# Altium PCB TC-temp-logger-base.PcbDoc (part 5 of 5)
Units mil, origin at the board's own origin, x right, y up, seen from the top; angles counter-clockwise.
Board outline 6370.08 x 6889.76 mil, 4 copper layers (Top Layer, Layer 2, Layer 1, Bottom Layer), stack 61.581 mil thick; 216 components, 163 nets, 792 pads, 3713 vias.
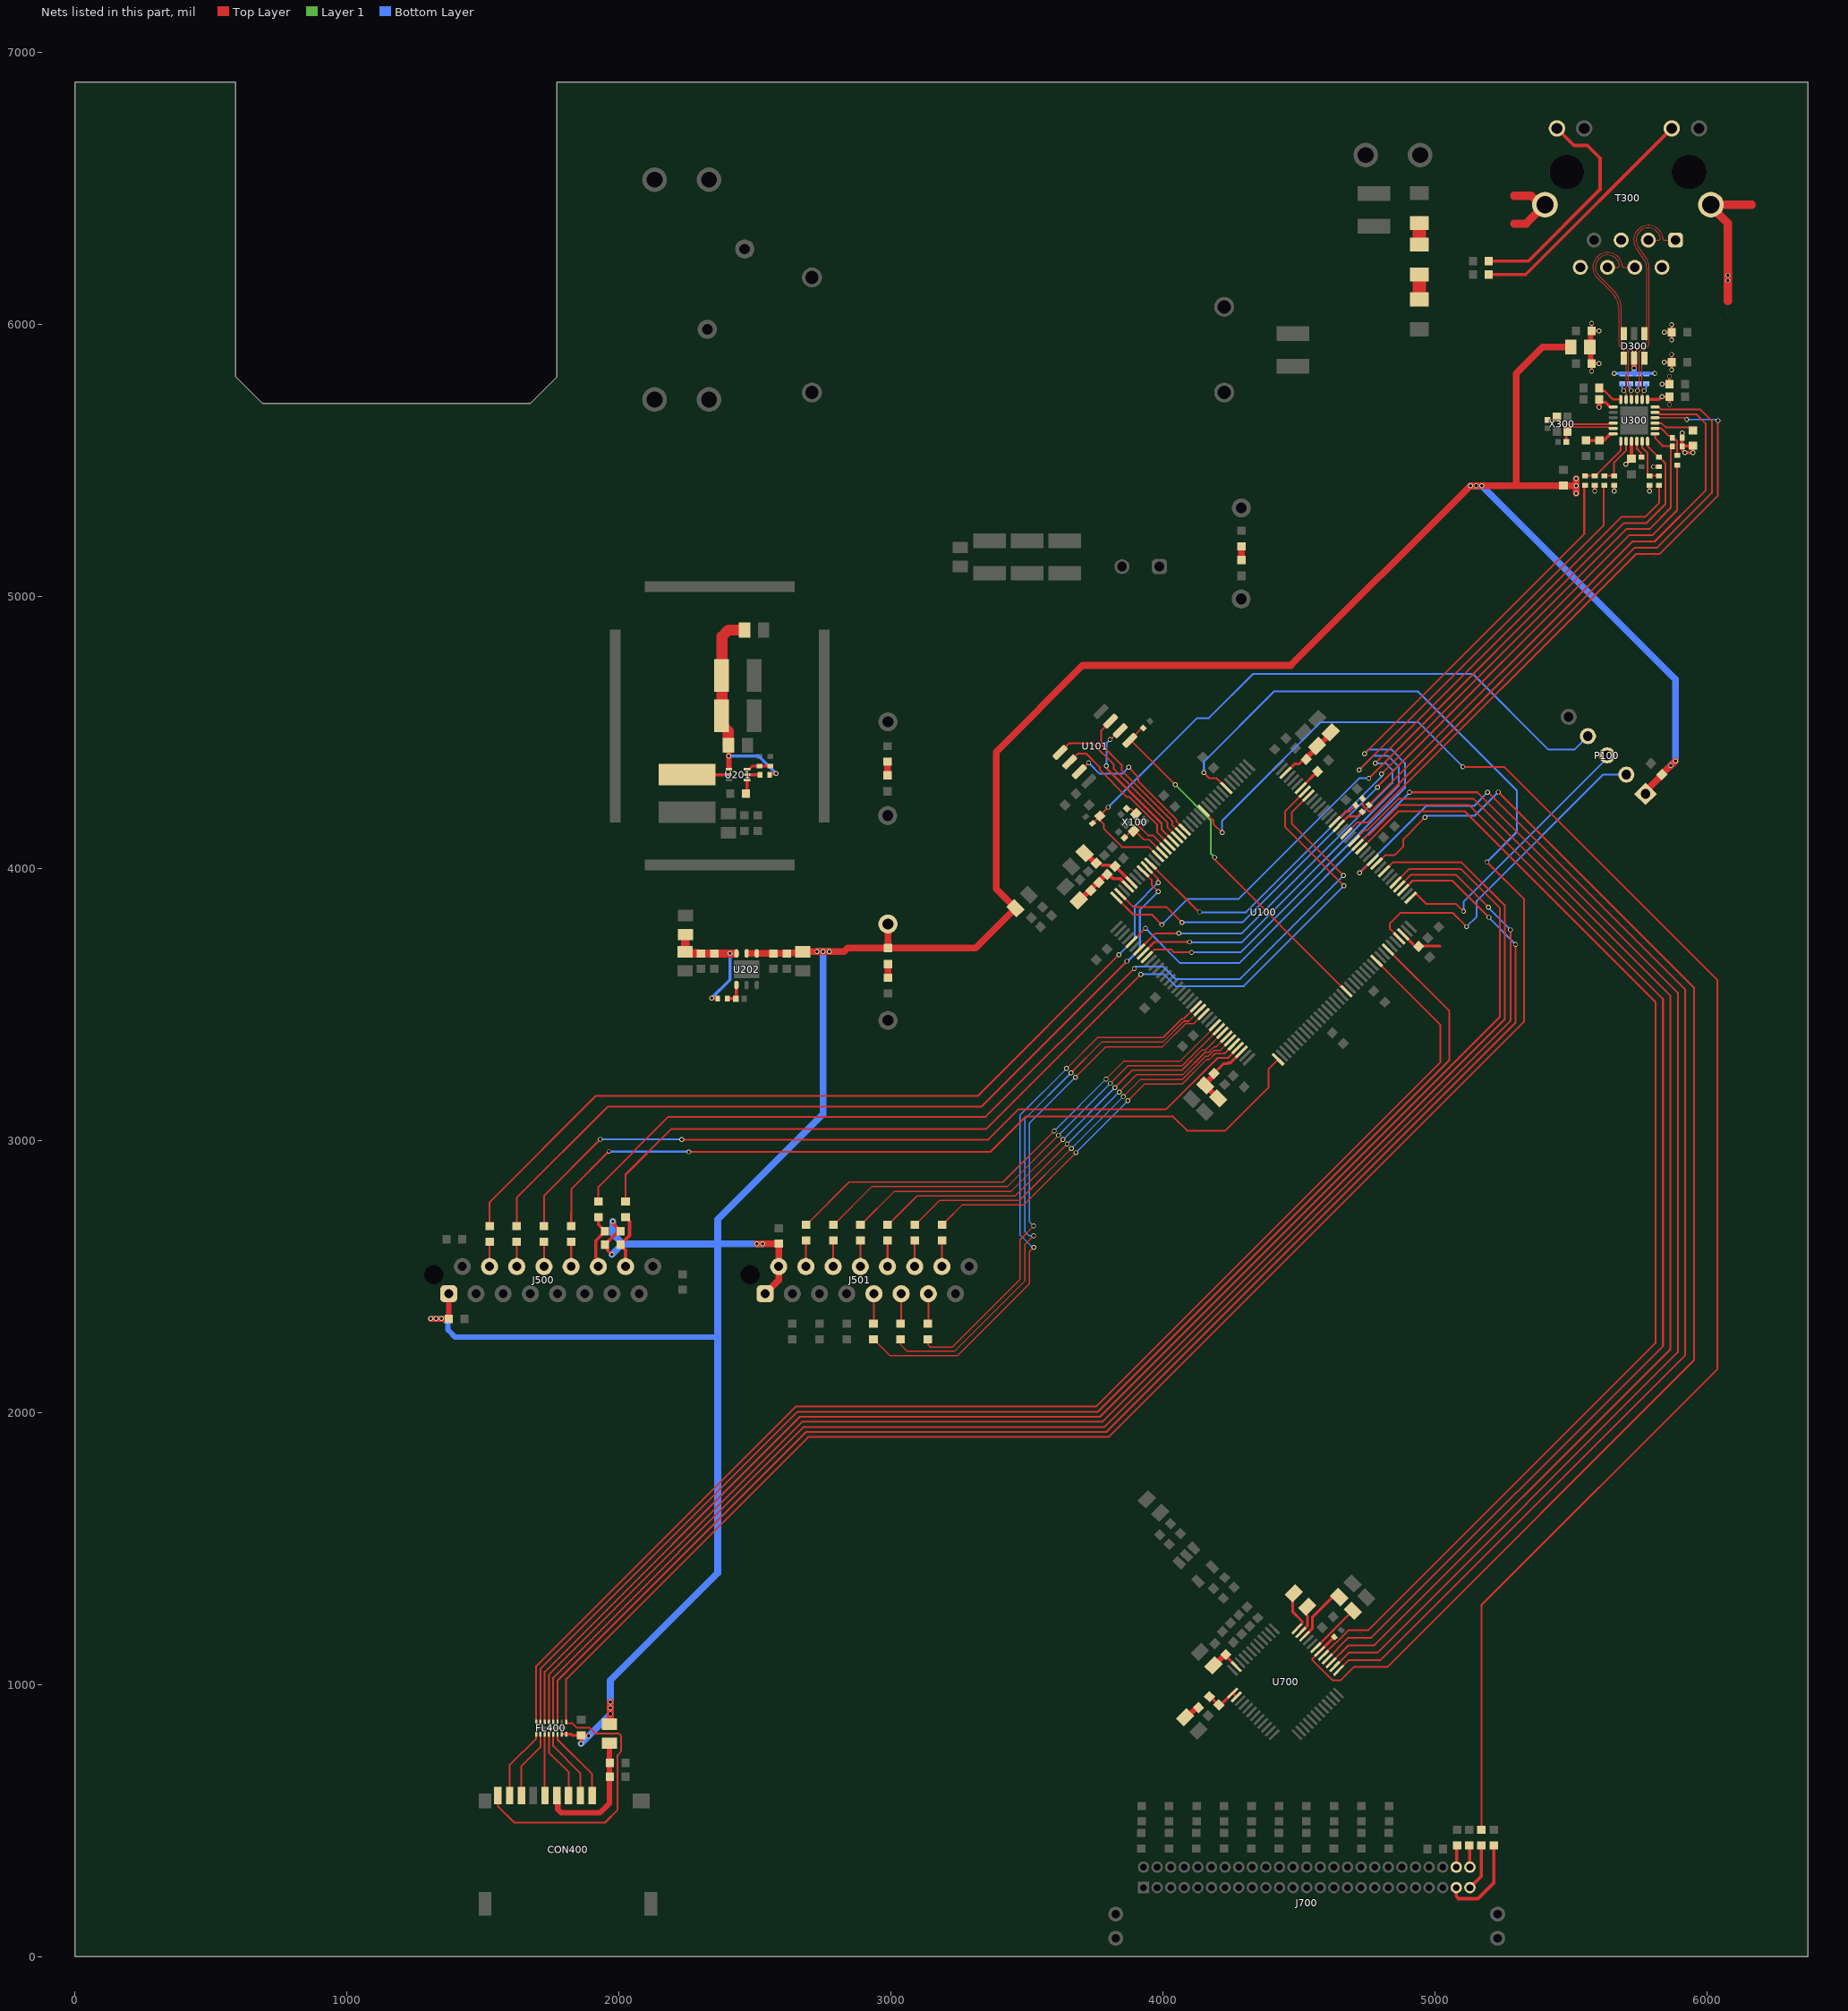
[diagram p6: the nets of this part, all layers, seen from the top]

## Via types
v1: diameter 17.72, hole 11.81, Top Layer to Bottom Layer, tented both sides, 3702 vias
v2: diameter 23.62, hole 11.81, Top Layer to Bottom Layer, 9 vias
v3: diameter 19.68, hole 7.87, Top Layer to Bottom Layer, tented both sides, 2 vias

## Nets (pads, with @x,y where several pads share a name; then routed paths per layer and width w, separated by ;. In a path a pad name is that pad's centre, name@x,y a point inside that pad or via, vN(x,y) a via of type N, cw(c..) or ccw(c..) an arc to the next point about the centre after c; other vN are vias at no path point) (continued)
HW_ID3: R705.2 U100.13 | length 6000.6
  Top Layer w6.66: U100.13@4148.61,4211.91 4184.36,4176.15 4184.36,4163.08 v1(4216.54,4130.91) ; v1(5101.38,4373.2) 5253.39,4373.2 6037.57,3589.02 6037.57,2159.02 5170,1291.44 R705.2@5170,465
  Bottom Layer w6.66: v1(4216.54,4130.91) 4216.54,4175.2 4578.65,4537.32 4937.26,4537.32 v1(5101.38,4373.2)
I2C1_SCL: R506.1 U100.136 | length 3703.7
  Top Layer w6.66: R506.1@1923.6,2774.59 1923.6,2829.11 2181.1,3086.61 3347.44,3086.61 3892.72,3631.89 v1(3893.7,3631.89) ; U100.136@4533.9,4267.58 4473.43,4207.11 4473.43,4163.39 v1(4663.39,3973.43)
  Bottom Layer w6.66: v1(3893.7,3631.89) 3900.59,3638.78 4000,3638.78 4045.28,3593.5 4283.46,3593.5 v1(4663.39,3973.43)
I2C1_SCL_CON_6: J500.12 R500.1 R506.2 | length 210
  Top Layer w12: J500.12@1923.6,2536.05 1914.37,2545.28 1914.37,2631.27 1948.16,2665.07 1948.16,2667.03 1939.4,2675.8 1938.41,2675.8 1923.6,2690.62 R506.2@1923.6,2717.51
I2C1_SDA: R507.1 U100.137 | length 3682
  Top Layer w6.66: R507.1@2023.6,2774.59 2023.6,2873.99 2190.94,3041.34 3348.43,3041.34 v1(3917.32,3610.24) ; U100.137@4519.98,4281.5 4447.83,4209.36 4447.83,4152.56 v1(4664.89,3935.51)
  Bottom Layer w6.66: v1(3917.32,3610.24) 4002.95,3610.24 4046.26,3566.93 4296.31,3566.93 v1(4664.89,3935.51)
I2C1_SDA_CON_6: J500.14 R501.1 R507.2 | length 209.5
  Top Layer w12: J500.14@2023.6,2536.05 2023.6,2596.72 2005.25,2615.07 R501.1@2005.25,2616.05 2005.25,2617.03 2038.39,2650.17 2038.39,2701.71 2033.34,2706.76 2033.34,2708.74 2024.58,2717.51 R507.2@2023.6,2717.51
LTC_INTERRUPT: U100.119 U700.37 | length 4787.1
  Top Layer w6.66: U700.37@4644.87,1051.76 4682.68,1089.57 4799.22,1089.57 5919.36,2209.71 5919.36,3554.14 5193.97,4279.53 v1(5192.91,4279.53) ; v1(4722.44,3983.27) 4722.85,3983.27 U100.119@4770.53,4030.95
  Bottom Layer w6.66: v1(4722.44,3983.27) 4722.44,3984.25 4967.52,4229.33 5142.72,4229.33 v1(5192.91,4279.53)
LTC_RST: R700.2 U100.118 U700.42 | length 4989.7
  Top Layer w6.66: U700.42@4575.27,1121.36 4549.21,1095.29 4549.21,1088.58 4623.03,1014.76 4651.57,1014.76 4700.79,1063.98 4823.82,1063.98 5951.77,2191.93 5951.77,3561.02 v1(5232.28,4280.51) ; U100.118@4784.45,4017.03 4784.75,4017.03 4816.93,4049.21 4851.38,4049.21 4882.87,4080.71 4882.87,4107.28 v1(4962.6,4187.01)
  Top Layer w10: U700.42@4575.27,1121.36 4575.39,1121.36 4621.5,1167.47 4622.47,1167.47
  Bottom Layer w6.66: v1(4962.6,4187.01) 4963.58,4187.01 4970.47,4193.9 5145.67,4193.9 v1(5232.28,4280.51)
NetC100_1: C100.1 C101.1 C102.1 U100.142 | length 232.4
  Top Layer w10: U100.142@4450.38,4351.1 4483.45,4384.16 4499.51,4384.16 4516.35,4400.99 C100.1@4526.17,4400.99
  Top Layer w20: C100.1@4526.17,4400.99 4526.17,4405.4 4616.04,4495.28 C101.1@4616.04,4499.68
NetC103_1: C103.1 C104.1 C105.1 U100.70 | length 265.5
  Top Layer w10: C103.1@4186.23,3245.81 4222.8,3282.38 4235.21,3282.38 4237.15,3284.32 4246.61,3284.32 U100.70@4287.81,3325.52
  Top Layer w20: C103.1@4179.5,3245.81 C103.1@4186.23,3245.81 4186.23,3239.33 4154.97,3208.07 C105.1@4154.97,3201.58 C104.1@4202.32,3154.23
NetC107_1: C107.1 JP100.1 U100.106 | length 153.9
  Top Layer w10: U100.106@4881.89,3757.02 4925.6,3713.31 C107.1@4939.1,3713.31 4939.79,3714 5016.54,3714 JP100.1@5017.16,3713.39
NetC112_1: C112.1 C113.1 FB101.1 R102.2 U100.33 | length 238.4
  Top Layer w12: R102.2@3794.28,3978.13 3799.62,3978.13 3815.15,3962.6 3841.14,3962.6 U100.33@3870.22,3933.52
  Top Layer w20: FB101.1@3689.87,3882.53 3694.28,3882.53 3789.87,3978.13 R102.2@3794.28,3978.13
NetC114_1: C114.1 C115.1 R102.1 U100.32 | length 218.7
  Top Layer w12: R102.1@3753.91,4018.49 3754.61,4019.19 3767,4019.19 3774.9,4011.29 3805.73,4011.29 3810.39,4006.63 3822.78,4006.63 C114.1@3823.48,4007.33 3823.87,4007.33 3883.76,3947.44 U100.32@3884.14,3947.44
  Top Layer w20: C115.1@3711.36,4055.58 3714.09,4055.58 3751.18,4018.49 R102.1@3753.91,4018.49
NetC205_1: C205.1 U201.4 | length 50.4
  Top Layer w12: C205.1@2465.56,4275.29 ccw(c2465.56,4280.24) 2470.52,4280.24 U201.4@2470.52,4322.88
NetC206_1: C206.1 C207.1 C208.1 FB200.2 R203.1 U201.1 | length 810.8
  Top Layer w12: R203.1@2553.16,4344.18 2556.02,4347.04 2556.02,4347.51 2575.5,4347.51 v1(2576.59,4348.6)
  Top Layer w20: 2402.95,4369.5 v1(2402.95,4412.45) C206.1@2402.95,4448.46
  Top Layer w25: C206.1@2399.99,4450.43 C206.1@2402.02,4452.45
  Top Layer w40: C206.1@2402.02,4452.45 2401.02,4453.45 2401.02,4503.72 2377.02,4527.72 C207.1@2377.02,4560.72 2377.95,4561.65 2377.95,4852.25 2401.38,4875.68 FB200.2@2461.07,4875.68
  Bottom Layer w12: v1(2402.95,4412.45) 2512.74,4412.45 v1(2576.59,4348.6)
NetC212_1: C212.1 C213.1 C214.1 FB201.1 R206.1 U202.6 | length 466.9
  Top Layer w12: v1(2339.57,3522.64) 2340.55,3521.65 2361.22,3521.65 R206.1@2362.2,3520.67
  Top Layer w30: FB201.1@2244.09,3756.34 2243.11,3755.35 2243.11,3694.45 C212.1@2242.13,3693.46 2248.13,3687.46 2289.19,3687.46 2289.65,3687.01 C213.1@2350.39,3687.01 v1(2407.48,3687.01) U202.6@2426.74,3687.01
  Bottom Layer w12: v1(2339.57,3522.64) 2407.48,3590.55 v1(2407.48,3687.01)
NetC218_1: C218.1 R206.2 U202.1 | length 82.5
  Top Layer w12: R206.2@2397.64,3520.67 C218.1@2429.13,3520.67 2430.39,3521.92 2430.39,3570.15 U202.1@2431.1,3570.87
NetC401_1: C401.1 C402.1 CON400.4 FB400.2 | length 485.4
  Top Layer w20: CON400.4@1770.55,591.61 1774.33,587.83 1774.33,540.63 1787.4,527.56 1929.13,527.56 1964.57,562.99 1964.57,661.26 1964.57,711.26 1964.57,779.96 FB400.2@1968.5,783.9
NetC720_1: C720.1 U700.48 | length 154.3
  Top Layer w10: C720.1@4480.25,1334.75 4475.66,1330.15 4475.66,1267.46 4510.86,1232.25 4510.86,1223.97 U700.48@4491.76,1204.87
NetC720_2: C720.2 U700.47 | length 108.1
  Top Layer w10: U700.47@4505.68,1190.95 4529.75,1215.02 4529.75,1253.43 4525.15,1258.03 4525.15,1280.66 C720.2@4529.75,1285.25
NetC721_1: C721.1 U700.46 | length 212.2
  Top Layer w10: U700.46@4519.6,1177.03 4549.21,1206.65 4549.21,1248.03 4623.38,1322.2 4646.01,1322.2 C721.1@4647,1321.21
NetC722_1: C722.1 U700.43 | length 169.2
  Top Layer w8: U700.43@4568.25,1142.16 4687.14,1261.06 C722.1@4687.14,1262.14
NetC723_1: C723.1 C724.1 U700.11 | length 122.1
  Top Layer w10: C724.1@4230.18,1109.82 4230.18,1104.54 U700.11@4269.05,1065.68
  Top Layer w20: C723.1@4184.75,1070.25 4187.68,1070.25 4227.25,1109.82 C724.1@4230.18,1109.82
NetC725_1: C725.1 R701.2 U700.13 U700.14 | length 134.9
  Top Layer w8: U700.13@4255.13,968.24 U700.14@4269.05,954.32
  Top Layer w10: R701.2@4170.18,955.18 4172.68,955.18 4202.68,925.18 C725.1@4205.18,925.18 4212.07,925.18 U700.13@4255.13,968.24
NetC726_1: C726.1 R701.1 | length 64.3
  Top Layer w20: C726.1@4080.25,879.75 4087.5,879.75 4122.82,915.07 4129.56,915.07 R701.1@4129.82,914.82
NetD200_1: D200.1 R200.2 | length 50.2
  Top Layer w25: D200.1@4287.4,5133.86 R200.2@4287.4,5184.06
NetD201_1: D201.1 R201.2 | length 50.2
  Top Layer w25: D201.1@2987.06,4341.68 R201.2@2987.06,4391.87
NetD202_1: D202.1 R202.2 | length 50.2
  Top Layer w25: R202.2@2988.19,3597.44 D202.1@2988.19,3647.64
NetJ700_47: J700.47 R704.1 | length 334.3
  Top Layer w12: J700.47@5077.56,253.15 5077.56,221.65 5086.61,212.6 5157.48,212.6 5215,270.12 R704.1@5215,407.91
NetJ700_48: J700.48 R703.1 | length 80.8
  Top Layer w12: J700.48@5077.56,328.15 5078.78,329.37 5078.78,406.69 R703.1@5080,407.91
NetJ700_49: J700.49 R705.1 | length 172.3
  Top Layer w12: J700.49@5127.56,253.15 5170,295.59 R705.1@5170,407.91
NetJ700_50: J700.50 R702.1 | length 80.8
  Top Layer w12: R702.1@5125,407.91 5126.28,406.63 5126.28,329.43 J700.50@5127.56,328.15
NetL200_1: L200.1 U201.2 | length 153.5
  Top Layer w12: L200.1@2250.01,4344.18 U201.2@2403.52,4344.18
NetR101_2: R101.2 U100.138 | length 86.7
  Top Layer w10: U100.138@4506.06,4295.42 4567.29,4356.65 R101.2@4567.44,4356.65
NetR203_2: R203.2 U201.5 | length 47.2
  Top Layer w12: U201.5@2470.52,4344.18 R203.2@2517.73,4344.18
NetR204_1: R204.1 R205.2 U201.6 | length 89.5
  Top Layer w10: U201.6@2470.52,4363.87 2477.52,4363.87 2489.33,4375.68 R205.2@2515.76,4375.68 R204.1@2555.13,4375.68
NetR304_1: R304.1 R317.2 U300.14 | length 155.9
  Top Layer w6.66: U300.14@5808.07,5617.13 5831.69,5617.13 5859.38,5589.44 5866.19,5589.44 5872.05,5583.58 5872.05,5580.54 5877.58,5575.02 5885.86,5575.02 5889.76,5571.11 R304.1@5889.76,5517.72
NetR305_1: R305.1 R311.2 U300.11 | length 170.1
  Top Layer w6.66: U300.11@5760.83,5569.88 5760.83,5546.26 5780.8,5526.28 5780.8,5448.44 5786.33,5442.91 R311.2@5787.8,5442.91 R305.1@5818.9,5442.91
NetR306_1: R306.1 R308.2 U300.8 | length 180.7
  Top Layer w6.66: R306.1@5622.05,5442.91 R308.2@5657.48,5442.91 5657.48,5492.13 5701.77,5536.42 U300.8@5701.77,5569.88
NetR307_1: R307.1 R309.2 U300.7 | length 203.1
  Top Layer w6.66: R307.1@5551.18,5442.91 R309.2@5586.61,5442.91 5588.58,5442.91 5682.09,5536.42 U300.7@5682.09,5569.88
NetR310_2: R310.2 U300.10 | length 65
  Top Layer w6.66: U300.10@5741.14,5569.88 5741.14,5542.32 5757.31,5526.15 5757.31,5512.3 R310.2@5757.8,5511.81
NetR312_2: R312.2 T300.12 | length 837
  Top Layer w12: R312.2@5196.85,6232.48 5342.72,6232.48 5606.3,6496.06 5606.3,6610.24 5559.06,6657.48 5510.24,6657.48 T300.12@5447.64,6720.08
NetR313_2: R313.2 T300.10 | length 895.4
  Top Layer w12: R313.2@5196.85,6182.87 5332.48,6182.87 T300.10@5869.69,6720.08
NetR316_1: R316.1 U300.15 | length 150
  Top Layer w6: U300.15@5808.07,5636.81 5809.18,5635.7 5832.81,5635.7 5847.18,5621.33 5935.95,5621.33 R316.1@5947.05,5610.24
NetR318_2: R318.2 U300.24 | length 97.3
  Top Layer w8: R318.2@5602.36,5765.71 5613.13,5754.91 5623.04,5754.91 5654.53,5723.42 U300.24@5682.09,5723.42
NetR319_2: R319.2 R320.1 | length 79.7
  Top Layer w50: R320.1@4941.93,6292.32 R319.2@4941.93,6372.05
NetR320_2: R320.2 R321.1 | length 90.6
  Top Layer w50: R321.1@4941.93,6091.54 R320.2@4941.93,6182.09
OCTOSPI1_CLK_2: U100.22 U101.6 | length 541.1
  Top Layer w6.66: U101.6@3656.25,4390.82 3687.68,4422.24 3716.22,4422.24 3766.39,4372.07 3766.39,4363.01 3867.35,4262.06 3876.41,4262.06 3977.36,4161.11 3977.36,4132.61 U100.22@4023.34,4086.63
OCTOSPI1_CS_2: R103.1 U100.91 U101.1 | length 1322.6
  Top Layer w6.66: R103.1@3926.57,4515.78 3922.63,4515.78 U101.1@3877.29,4470.44 3881.92,4470.44 v1(4044.29,4308.07) ; v1(4188.98,4040.35) 4188.98,4032.35 U100.91@4673.1,3548.23
  Layer 1 w6.66: v1(4044.29,4308.07) 4044.29,4307.09 4175.2,4176.18 4175.2,4054.13 v1(4188.98,4040.35)
OCTOSPI1_IO0_2: U100.20 U101.5 | length 607.1
  Top Layer w6.66: U101.5@3620.9,4426.18 3654.37,4459.65 3740.16,4459.65 3818.9,4380.91 3818.9,4365.16 4014.99,4169.07 4014.99,4150.66 U100.20@4051.18,4114.47
OCTOSPI1_IO1_2: U100.21 U101.2 | length 530.7
  Top Layer w6.66: v1(3791.34,4375.98) 3793.45,4373.87 3793.45,4366 3994.09,4165.36 3994.09,4143.71 U100.21@4037.26,4100.55 ; v1(3805.12,4473.43) 3807.34,4473.43 3839.71,4505.8 U101.2@3841.94,4505.8
  Bottom Layer w6.66: v1(3791.34,4375.98) 3791.34,4459.65 v1(3805.12,4473.43)
OCTOSPI1_IO2_2: U100.19 U101.3 | length 548
  Top Layer w6.66: U101.3@3806.58,4541.15 3772.64,4507.21 3772.64,4454.72 3847.44,4379.92 3847.44,4359.82 4033.46,4173.8 4033.46,4160.02 U100.19@4065.09,4128.39
OCTOSPI1_IO3_2: U100.18 U101.7 | length 535.3
  Top Layer w6.66: U101.7@3691.61,4355.47 3692.74,4355.47 3725,4387.72 v1(3726.13,4387.72) ; v1(3873.03,4371.06) 3908.07,4336.02 3908.07,4320.39 4049.21,4179.25 4049.21,4172.11 U100.18@4079.01,4142.31
  Bottom Layer w6.66: v1(3726.13,4387.72) 3766.41,4347.44 3849.41,4347.44 v1(3873.03,4371.06)
RESET_2: C108.1 P100.4 R100.1 U100.25 | length 2480.7
  Top Layer w6.66: R100.1@3740.06,4165.07 3767.41,4192.41 C108.1@3767.72,4192.41 ; v1(3797.24,4224.41) 3767.72,4194.88 C108.1@3767.72,4192.41 ; U100.25@3981.58,4044.87 3947.71,4078.74 3848.43,4078.74 3781.5,4145.67 3781.5,4162.4 3767.69,4176.21 C108.1@3767.72,4192.41
  Bottom Layer w6.66: v1(3797.24,4224.41) 4125,4552.17 4168.31,4552.17 4330.71,4714.57 5137.8,4714.57 5416.34,4436.02 5511.45,4436.02 P100.4@5561.33,4485.91
RMII-ETH.RMII_TXD0: R104.1 U300.17 | length 2165.4
  Top Layer w6.65: R104.1@4756.62,4233 5725.31,5201.69 5806.8,5201.69 5994.05,5388.93 5994.05,5635.16 5959.92,5669.29 5825.32,5669.29 5818.43,5676.18 U300.17@5808.07,5676.18
RMII-ETH.RMII_TXD1: R105.1 U300.18 | length 2297.5
  Top Layer w6.65: R105.1@4733,4256.62 4734.39,4255.23 4734.39,4230.18 4755.01,4209.56 4764.68,4209.56 5733.91,5178.79 5815.95,5178.79 6016.71,5379.55 6016.71,5644.71 5975.24,5686.18 5830.16,5686.18 5820.47,5695.87 U300.18@5808.07,5695.87
RMII_CRS_DV: R305.2 U100.43 | length 2810.9
  Top Layer w6.65: U100.43@3911.98,3701.34 3971.47,3760.83 v1(4057.09,3760.83) ; v1(4779.4,4385.95) 5684.79,5291.34 5771.65,5291.34 5822.83,5342.52 R305.2@5822.83,5407.48
  Bottom Layer w6.65: v1(4057.09,3760.83) 4058.07,3759.84 4288.39,3759.84 4842.52,4313.98 4842.52,4362.2 4818.77,4385.95 v1(4779.4,4385.95)
RMII_MDC: R314.2 U100.27 U300.13 | length 2929
  Top Layer w6.65: U100.27@3953.74,4017.03 4131.21,3839.57 v1(4133.86,3839.57) ; v1(4803.25,4347.1) 5703.15,5247.01 5788.03,5247.01 5866.14,5325.12 5866.14,5540.29 5866.52,5540.67 5866.52,5546.16 R314.2@5872.05,5551.69 5838.07,5551.69 5808.07,5581.69 U300.13@5808.07,5597.44
  Bottom Layer w6.65: v1(4133.86,3839.57) 4134.84,3838.58 4304.57,3838.58 4801.5,4335.52 4801.5,4345.36 v1(4803.25,4347.1)
RMII_MDIO: R315.2 U100.36 U300.12 | length 2959.8
  Top Layer w6.65: U100.36@3828.46,3891.76 3890.61,3829.62 3958.77,3829.62 v1(3995.08,3793.31) ; v1(4755.91,4330.71) 5694.54,5269.34 5777.21,5269.34 5846.46,5338.58 5846.46,5488.97 5830.62,5504.81 5830.62,5505.95 5824.76,5511.81 R315.2@5822.8,5511.81 5820.83,5511.81 5781.59,5551.05 5781.59,5568.81 U300.12@5780.51,5569.88
  Bottom Layer w6.65: v1(3995.08,3793.31) 4088.58,3886.81 4276.57,3886.81 4720.47,4330.71 v1(4755.91,4330.71)
RMII_REF_CLK: R304.2 U100.35 | length 2885.1
  Top Layer w6: U100.35@3842.38,3905.68 3890.78,3857.28 4012.8,3857.28 v1(4068.9,3801.18)
  Top Layer w6.65: v1(4788.37,4298.25) 4788.37,4300.18 5712.54,5224.35 5797.42,5224.35 5889.76,5316.69 R304.2@5889.76,5482.28
  Bottom Layer w6.65: v1(4068.9,3801.18) 4291.3,3801.18 v1(4788.37,4298.25)
RMII_RXD0: R306.2 U100.44 | length 2867.7
  Top Layer w6.65: U100.44@3925.9,3687.42 3967.81,3729.33 v1(4096.46,3729.33) ; v1(4720.47,4362.2) 5618.72,5260.45 5618.72,5404.15 R306.2@5622.05,5407.48
  Bottom Layer w6.65: v1(4096.46,3729.33) 4097.44,3728.35 4289.37,3728.35 4866.14,4305.12 4866.14,4374.02 4826.77,4413.39 4771.65,4413.39 v1(4720.47,4362.2)
RMII_RXD1: R307.2 U100.45 | length 2805
  Top Layer w6.65: U100.45@3939.82,3673.5 3968.09,3701.77 4029.3,3701.77 4040.13,3690.94 v1(4104.33,3690.94) ; v1(4740.16,4421.26) 5547.85,5228.96 5547.85,5404.15 R307.2@5551.18,5407.48
  Bottom Layer w6.65: v1(4104.33,3690.94) 4284.45,3690.94 4888.6,4295.1 4888.6,4386.99 4838.58,4437.01 4755.91,4437.01 v1(4740.16,4421.26)
RMII_TX_EN: U100.126 U300.16 | length 2391.9
  Top Layer w6: U300.16@5808.07,5656.5 5915,5656.5 5919.95,5651.55 5923.26,5651.55 v1(5925.2,5649.61)
  Top Layer w6.65: U100.126@4673.1,4128.39 4714,4169.29 4751.97,4169.29 5737.84,5155.17 5824.37,5155.17 6039.37,5370.16 v1(6039.37,5645.67)
  Bottom Layer w6: v1(5925.2,5649.61) 6032.26,5649.61 6036.2,5645.67 v1(6039.37,5645.67)
RMII_TXD0_2: R104.2 U100.128 | length 107.7
  Top Layer w8: U100.128@4645.26,4156.23 4680.09,4191.06 4714.69,4191.06 R104.2@4731.57,4207.94
RMII_TXD1_2: R105.2 U100.129 | length 102
  Top Layer w8: U100.129@4631.34,4170.15 4669.85,4208.66 4685.04,4208.66 R105.2@4707.94,4231.57
RX_4_N: D300.3 R300.1 T300.6 U300.22 | length 741.2
  Top Layer w3.98: 5603.11,6176.4 5655.75,6123.77 cw(c5585.04,6053.06) 5685.04,6053.06 5685.04,5994.56
  Top Layer w4: 5603.11,6176.4 cw(c5633.66,6209.45) 5678.11,6216.48 cw(c5671.24,6216.48) 5671.24,6209.61 5667.14,6209.61 T300.6@5633.71,6209.61 ; 5685.04,5994.75 cw(c5675.87,5994.75) 5685.04,5994.63 5685.04,5994.56 5685.04,5986.59 D300.3@5693.9,5965.55 ; D300.3@5693.9,5953.58 5684.83,5944.51 5684.83,5927.61 5711.21,5901.22 5711.21,5765.56 v1@5721.46,5755.32 ; v1(5720.47,5755.91) 5718.4,5753.83 5718.4,5739.11 5721.46,5736.05 U300.22@5721.46,5723.42
  Bottom Layer w5.75: R300.1@5716.54,5781.5 5716.54,5763.08 5720.47,5759.14 v1(5720.47,5755.91)
RX_4_P: D300.4 R301.1 T300.4 U300.23 | length 782.6
  Top Layer w3.98: 5594.68,6171.84 5595.37,6171.15 5649.63,6116.89 cw(c5586.29,6053.54) 5675.87,6053.54 5675.87,5994.75
  Top Layer w4: 5595.37,6171.15 cw(c5633.66,6209.45) 5594.68,6171.84 cw(c5633.66,6209.45) 5687.16,6217.94 ; 5675.87,5994.75 5675.32,5952.99 ccw(c5680.48,5952.93) 5675.32,5952.93 5675.32,5923.19 5685.66,5912.85 5688.27,5910.23 5693.9,5904.61 D300.4@5693.9,5875 5703.1,5865.79 5703.1,5766.1 v1(5692.91,5755.91) ; 5687.17,6217.92 ccw(c5692.33,6218.26) 5687.2,6217.65 cw(c5678.11,6216.48) 5687.23,6215.59 5687.17,6214.99 ccw(c5692.32,6214.61) 5692.29,6209.45 T300.4@5733.66,6209.45 ; v1(5692.91,5755.91) 5701.77,5747.08 U300.23@5701.77,5723.42
  Bottom Layer w5.75: R301.1@5687.01,5781.5 5687.01,5764.8 5692.91,5758.9 v1(5692.91,5755.91)
SD-Detect: CON400.9 FL400.1 U100.7 | length 8214.6
  Top Layer w6.66: CON400.9@1554.02,591.61 1554.02,552.28 1614.17,492.13 1947.83,492.13 1994.09,538.39 1994.09,740.16 2006.89,752.95 2006.89,811.57 1999.57,818.9 1913.39,818.9 1891.02,841.26 1843.78,841.26 1828.36,856.68 1805.57,856.68 1804.96,857.28 FL400.1@1804.96,862.2 1804.96,1019.29 2695.12,1909.45 3799.21,1909.45 5326.77,3437.01 5326.77,3886.81 v1(5189.96,4023.62) ; v1(4149.61,4351.38) 4169.59,4331.4 4196.15,4331.4 U100.7@4232.13,4295.42
  Bottom Layer w6.66: v1(4149.61,4351.38) 4149.61,4391.73 4408.46,4650.59 4936.02,4650.59 5300.2,4286.42 5300.2,4133.86 v1(5189.96,4023.62)
SD_CLK_5: CON400.5 FL400.11 | length 225.7
  Top Layer w6.66: FL400.11@1726.22,816.93 1726.22,592.64 CON400.5@1727.24,591.61
SD_CMD_5: CON400.3 FL400.12 | length 255.1
  Top Layer w6.66: FL400.12@1741.97,816.93 1741.97,750.16 1813.86,678.27 CON400.3@1813.86,591.61
SD_D0_5: CON400.7 FL400.10 | length 254.2
  Top Layer w6.66: CON400.7@1640.63,591.61 1640.63,699.68 1710.47,769.53 FL400.10@1710.47,816.93
SD_D1_5: CON400.8 FL400.9 | length 265.7
  Top Layer w6.66: CON400.8@1597.32,591.61 1597.32,703.62 1694.72,801.02 FL400.9@1694.72,816.93
SD_D2_5: CON400.1 FL400.14 | length 277.9
  Top Layer w6.66: FL400.14@1773.46,816.93 1773.46,797.4 1900.47,670.39 CON400.1@1900.47,591.61
SD_D3_5: CON400.2 FL400.13 | length 266.5
  Top Layer w6.66: FL400.13@1757.72,816.93 1757.72,773.78 1857.17,674.33 CON400.2@1857.17,591.61
SDMMC1_CK: FL400.6 U100.113 | length 5557
  Top Layer w6.66: FL400.6@1726.22,862.2 1726.22,1046.11 2664.2,1984.09 3768.3,1984.09 5237.12,3452.92 5237.12,3855.03 5094.3,3997.85 4904.46,3997.85 U100.113@4854.05,3947.44
SDMMC1_CMD: FL400.5 U100.116 | length 5626.4
  Top Layer w6.66: FL400.5@1741.97,862.2 1741.97,1035.46 2671.93,1965.43 3776.02,1965.43 5255.78,3445.19 5255.78,3862.75 5095.9,4022.64 4845.73,4022.64 U100.116@4812.29,3989.2
SDMMC1_D0: FL400.7 U100.102 | length 4962.9
  Top Layer w6.66: FL400.7@1710.47,862.2 1710.47,1056.75 2656.47,2002.75 3760.57,2002.75 5051.18,3293.36 5051.18,3476.37 U100.102@4826.21,3701.34
SDMMC1_D1: FL400.8 U100.99 | length 4918.8
  Top Layer w6.66: FL400.8@1694.72,862.2 1694.72,1067.39 2648.74,2021.41 3752.84,2021.41 5019.69,3288.26 5019.69,3424.35 U100.99@4784.45,3659.58
SDMMC1_D2: FL400.3 U100.111 | length 5489.4
  Top Layer w6.66: FL400.3@1773.46,862.2 1773.46,1014.18 2687.39,1928.11 3791.48,1928.11 5295.28,3431.9 v1(5295.28,3720.47) ; U100.111@4881.89,3919.6 4917.01,3954.72 5062.01,3954.72 v1(5196.85,3819.88)
  Bottom Layer w6.66: v1(5196.85,3819.88) 5196.85,3819.39 5295.28,3720.96 v1(5295.28,3720.47)
SDMMC1_D3: FL400.4 U100.112 | length 5527.2
  Top Layer w6.66: FL400.4@1757.72,862.2 1757.72,1024.82 2679.66,1946.77 3783.75,1946.77 5276.57,3439.59 v1(5276.57,3773.62) ; U100.112@4867.97,3933.52 4910.83,3976.38 5075.79,3976.38 v1(5195.87,3856.3)
  Bottom Layer w6.66: v1(5195.87,3856.3) 5195.87,3855.31 5276.57,3774.61 v1(5276.57,3773.62)
SHGND: JP300.1 JP301.1 JP302.1 JP303.1 T300.8 T300.Shell | length 799.5
  Top Layer w30: JP301.1@5290.35,6370.07 5334.44,6370.07 T300.Shell@5403.74,6439.37 5386.29,6439.37 5353.22,6472.44 JP302.1@5290.35,6472.44 ; JP300.1@6075.79,6084.65 6075.79,6371.12 6013.58,6433.33 T300.Shell@6013.58,6439.37 JP303.1@6163.39,6439.37
  other v1: 6076.07,6160.49 6076.07,6180.18
SPI1_CS: U100.122 U700.41 | length 4378.3
  Top Layer w6.66: U700.41@4589.19,1107.44 4680.64,1198.88 4753.94,1198.88 5810.04,2254.99 5810.04,3508.86 5109.25,4209.65 4865.71,4209.65 U100.122@4728.77,4072.71
SPI1_MISO: U100.124 U700.39 | length 4552.5
  Top Layer w6.66: U700.39@4617.03,1079.6 4681.66,1144.23 4776.58,1144.23 5864.7,2232.35 5864.7,3531.5 5140.29,4255.91 4866.14,4255.91 4750.98,4140.75 4741.13,4140.75 U100.124@4700.93,4100.55
SPI1_MOSI: U100.123 U700.40 | length 4465
  Top Layer w6.66: U700.40@4603.11,1093.52 4681.15,1171.55 4765.26,1171.55 5837.37,2243.67 5837.37,3520.18 5125.26,4232.28 4867.44,4232.28 4757.2,4122.05 4750.27,4122.05 U100.123@4714.85,4086.63
SPI1_SCK: U100.41 U700.38 | length 5709.7
  Top Layer w6.66: U100.41@3884.14,3729.18 3934.49,3779.53 v1(3935.04,3779.53) ; U700.38@4630.95,1065.68 4682.17,1116.9 4787.9,1116.9 5892.03,2221.03 5892.03,3542.82 5192.91,4241.93 5155.32,4279.53 v1(4905.51,4279.53)
  Bottom Layer w6.66: v1(3935.04,3779.53) 4062.99,3651.57 4279.8,3651.57 4905.51,4277.29 v1(4905.51,4279.53)
SPI2_CS: R505.1 U100.73 | length 3017.3
  Top Layer w6.66: R505.1@1823.6,2684.59 1823.6,2735.46 1823.82,2735.68 1823.82,2820.87 v1(1962.6,2959.65) ; v1(2256.89,2957.68) 3364.17,2957.68 3494.09,3087.6 4036.42,3087.6 4088.58,3035.43 4228.35,3035.43 4386.81,3193.9 4386.81,3261.94 U100.73@4422.55,3297.68
  Bottom Layer w6.66: v1(1962.6,2959.65) 1963.58,2958.66 2255.91,2958.66 v1(2256.89,2957.68)
SPI2_CS_CON_6: J500.10 R505.2 | length 91.5
  Top Layer w6.66: J500.10@1823.6,2536.05 R505.2@1823.6,2627.51
SPI2_MISO: R504.1 U100.28 | length 3178.4
  Top Layer w6.66: R504.1@1523.6,2684.59 1523.6,2772.61 1914.37,3163.39 3318.9,3163.39 v1(3837.6,3682.09) ; U100.28@3939.82,4003.11 3980.17,3962.77 3980.17,3948.97 v1(3982.28,3946.85)
  Bottom Layer w6.66: v1(3837.6,3682.09) 3837.6,3683.07 3895.67,3741.14 3895.67,3862.2 3980.31,3946.85 v1(3982.28,3946.85)
SPI2_MISO_CON_6: J500.4 R504.2 | length 91.5
  Top Layer w6.66: J500.4@1523.6,2536.05 R504.2@1523.6,2627.51
SPI2_MOSI: R503.1 U100.29 | length 3111
  Top Layer w6.66: R503.1@1623.6,2684.59 1623.6,2788.95 1958.66,3124.02 3332.68,3124.02 v1(3867.13,3658.46) ; U100.29@3925.9,3989.2 3957.68,3957.42 3957.68,3938.98 v1(3982.28,3914.37)
  Bottom Layer w6.66: v1(3867.13,3658.46) 3869.09,3658.46 3914.37,3703.74 3914.37,3846.46 v1(3982.28,3914.37)
SPI2_MOSI_CON_6: J500.6 R503.2 | length 91.5
  Top Layer w6.66: J500.6@1623.6,2536.05 R503.2@1623.6,2627.51
SPI2_SCK: R502.1 U100.69 | length 2887.9
  Top Layer w6.66: R502.1@1723.6,2684.59 1723.6,2796.43 v1(1931.1,3003.94) ; v1(2230.32,3002.95) 3357.28,3002.95 3468.59,3114.26 4010.91,3114.26 4199.8,3303.15 4237.6,3303.15 U100.69@4273.89,3339.44
  Bottom Layer w6.66: v1(1931.1,3003.94) 1931.59,3003.44 2229.82,3003.44 v1(2230.32,3002.95)
SPI2_SCK_CON_6: J500.8 R502.2 | length 91.5
  Top Layer w6.66: J500.8@1723.6,2536.05 R502.2@1723.6,2627.51
SWCLK_2: P100.3 U100.109 | length 1020.6
  Top Layer w6.66: U100.109@4909.73,3891.76 4925.32,3907.35 4928.4,3907.35 4966.23,3869.52 5076.35,3869.52 v1(5104.33,3841.54)
  Bottom Layer w6.66: v1(5104.33,3841.54) 5104.33,3876.97 5632.05,4404.68 P100.3@5632.05,4415.2
SWDIO_2: P100.2 U100.105 | length 1239.7
  Top Layer w6.66: U100.105@4867.97,3743.1 4833.66,3777.41 4833.66,3798.23 4871.06,3835.63 5064.96,3835.63 v1(5115.16,3785.43)
  Bottom Layer w6.66: v1(5115.16,3785.43) 5152.56,3822.83 5152.56,3879.92 5617.13,4344.49 P100.2@5702.76,4344.49
TX_4_N: D300.6 R302.1 T300.3 U300.20 | length 828.9
  Top Layer w3.98: 5786.98,5929.79 5786.98,6207.27
  Top Layer w4: U300.20@5761.1,5723.7 5761.1,5746.6 5767.72,5753.22 v1(5767.72,5755.91) 5767.72,5757.16 5759.67,5765.21 5759.67,5854.16 5768.7,5863.19 D300.6@5768.7,5875 5766.47,5877.24 5766.47,5903.34 5780.1,5916.97 ; 5780.12,5917 5782.78,5919.66 ccw(c5772.65,5929.79) 5786.98,5929.79 ; T300.3@5783.66,6309.45 5817.1,6309.45 5821.2,6309.45 ccw(c5821.2,6316.32) 5828.06,6316.32 ccw(c5783.62,6309.28) 5744.92,6286.32 5777.6,6239.53 5777.69,6239.4 5777.77,6239.27 cw(c5725.85,6207.01) 5786.98,6207.27
  Bottom Layer w5.75: v1(5767.72,5755.91) 5767.72,5756.93 5775.59,5764.8 R302.1@5775.59,5781.5
TX_4_P: D300.1 R303.1 T300.1 U300.21 | length 861.5
  Top Layer w3.98: D300.1@5777.81,5974.66 5777.81,6207.22
  Top Layer w4: 5737.07,6281.59 ccw(c5744.92,6286.32) 5737.45,6281.01 5765.72,6240.55 5769.9,6234.55 cw(c5765.68,6231.58) 5769.97,6234.46 5770.02,6234.38 cw(c5725.85,6207.01) 5777.81,6207.22 ; 5737.03,6281.66 cw(c5783.62,6309.28) 5837.11,6317.77 cw(c5828.06,6316.32) 5837.23,6316.32 cw(c5821.2,6316.32) 5837.17,6314.99 ccw(c5842.32,6314.61) 5842.29,6309.45 T300.1@5883.66,6309.45 ; U300.21@5741.14,5723.42 5741.14,5736.05 5743.9,5738.8 5743.9,5757.46 5743.07,5758.29 5749.99,5765.21 5749.99,5899.83 5773.62,5923.45 ; 5773.65,5923.49 5776.3,5926.14 ccw(c5772.65,5929.79) 5777.81,5929.79 5777.81,5944.51 D300.1@5768.7,5965.55 D300.1@5777.81,5974.66
  Bottom Layer w5.75: v1(5743.07,5755.91) 5743.07,5759.14 5746.06,5762.13 R303.1@5746.06,5781.5
USER-BUTTON1: R508.1 U100.63 | length 1809.9
  Top Layer w5: R508.1@2687.01,2688.98 2687.99,2688.98 2845.47,2846.46 3411.07,2846.46 v1(3599.24,3034.62) ; v1(3790.18,3225.57) 3855.95,3291.34 4062.99,3291.34 4190.37,3418.72 U100.63@4190.37,3422.95
  Bottom Layer w5: v1(3599.24,3034.62) v1(3790.18,3225.57)
USER-BUTTON1_CON_6: J501.4 R508.2 | length 96
  Top Layer w6.66: J501.4@2686.59,2536.05 2686.59,2631.47 R508.2@2687.01,2631.89
USER-BUTTON2: R509.1 U100.64 | length 1715.5
  Top Layer w5: R509.1@2787.01,2688.98 2787.99,2688.98 2928.66,2829.65 3426.22,2829.65 v1(3615.22,3018.64) ; v1(3806.16,3209.59) 3871.1,3274.53 4069.78,3274.53 U100.64@4204.29,3409.03
  Bottom Layer w5: v1(3615.22,3018.64) v1(3806.16,3209.59)
USER-BUTTON2_CON_6: J501.6 R509.2 | length 96
  Top Layer w6.66: J501.6@2786.59,2536.05 2786.59,2631.47 R509.2@2787.01,2631.89
USER-BUTTON3: R510.1 U100.65 | length 1623.7
  Top Layer w5: R510.1@2887.01,2688.98 2887.99,2688.98 3011.85,2812.83 3441.37,2812.83 v1(3631.2,3002.66) ; v1(3822.14,3193.61) 3886.25,3257.72 4068.74,3257.72 4143.84,3332.82 4155.91,3332.82 U100.65@4218.21,3395.11
  Bottom Layer w5: v1(3631.2,3002.66) v1(3822.14,3193.61)
USER-BUTTON3_CON_6: J501.8 R510.2 | length 96
  Top Layer w6.66: J501.8@2886.59,2536.05 2886.59,2631.47 R510.2@2887.01,2631.89
USER-BUTTON4: R511.1 U100.66 | length 1531.8
  Top Layer w5: R511.1@2987.01,2688.98 2987.99,2688.98 3095.04,2796.02 3456.51,2796.02 v1(3647.17,2986.68) ; v1(3838.12,3177.63) 3901.4,3240.91 4071.61,3240.91 4154.53,3323.82 4167.32,3323.82 4186.66,3343.16 4194.09,3343.16 U100.66@4232.13,3381.19
  Bottom Layer w5: v1(3647.17,2986.68) v1(3838.12,3177.63)
USER-BUTTON4_CON_6: J501.10 R511.2 | length 96
  Top Layer w6.66: J501.10@2986.59,2536.05 2986.59,2631.47 R511.2@2987.01,2631.89
USER-BUTTON5: R512.1 U100.67 | length 1440
  Top Layer w5: R512.1@3087.01,2688.98 3087.99,2688.98 3178.23,2779.21 3471.66,2779.21 v1(3663.15,2970.7) ; v1(3854.1,3161.65) 3916.54,3224.09 4070.55,3224.09 4155.35,3308.89 4165.19,3308.89 4186.02,3329.72 4208.5,3329.72 U100.67@4246.05,3367.28
  Bottom Layer w5: v1(3663.15,2970.7) v1(3854.1,3161.65)
USER-BUTTON5_CON_6: J501.12 R512.2 | length 96
  Top Layer w6.66: J501.12@3086.59,2536.05 3086.59,2631.47 R512.2@3087.01,2631.89
USER-BUTTON6: R513.1 U100.68 | length 1348.7
  Top Layer w5: R513.1@3187.01,2688.98 3187.99,2688.98 3200.26,2701.24 3200.26,2702.22 3260.43,2762.4 3486.81,2762.4 v1(3679.13,2954.72) ; v1(3870.08,3145.67) 3931.69,3207.28 4069.49,3207.28 4160.43,3298.23 4170.28,3298.23 4190.65,3318.6 4225.21,3318.6 U100.68@4259.97,3353.36
  Bottom Layer w5: v1(3679.13,2954.72) v1(3870.08,3145.67)
USER-BUTTON6_CON_6: J501.14 R513.2 | length 96
  Top Layer w6.66: J501.14@3186.59,2536.05 3186.59,2631.47 R513.2@3187.01,2631.89
USER-LED0: R517.1 U100.58 | length 2170.2
  Top Layer w5: R517.1@2934.84,2268.7 2935.83,2268.7 2995.87,2208.66 3244.09,2208.66 3507.87,2472.44 3507.87,2591.05 3522.87,2606.04 v1(3523.97,2606.04) ; v1(3645.21,3264.24) 3758.92,3377.95 4000,3377.95 4069.18,3447.13 4075.36,3447.13 U100.58@4120.77,3492.55
  Bottom Layer w5: v1(3523.97,2606.04) 3520.52,2606.04 3515.97,2610.6 3515.39,2610.6 3474.25,2651.73 3474.25,3093.29 v1(3645.21,3264.24)
USER-LED0_CON_6: J501.9 R517.2 | length 111
  Top Layer w6.66: R517.2@2934.84,2325.79 2936.59,2327.53 J501.9@2936.59,2436.05
USER-LED1: R518.1 U100.59 | length 2034.5
  Top Layer w5: R518.1@3034.84,2268.7 3034.84,2248.62 3059.06,2224.41 3232.28,2224.41 3492.13,2484.25 3492.13,2618.11 v1(3523.62,2649.61) ; v1(3661.19,3248.26) 3774.06,3361.14 3998.94,3361.14 4075.93,3438.13 4094.2,3438.13 U100.59@4134.69,3478.63
  Bottom Layer w5: v1(3523.62,2649.61) 3523.5,2649.72 3507.26,2649.72 3491.06,2665.93 3491.06,3078.14 v1(3661.19,3248.26)
USER-LED1_CON_6: J501.11 R518.2 | length 111
  Top Layer w6.66: R518.2@3034.84,2325.79 3036.59,2327.53 J501.11@3036.59,2436.05
USER-LED2: R519.1 U100.60 | length 1872.8
  Top Layer w5: R519.1@3134.84,2268.7 3135.48,2268.07 3135.48,2249.37 3144.69,2240.16 3224.41,2240.16 3473.19,2488.94 3473.19,2634.61 v1(3523.62,2685.04) ; v1(3677.17,3232.28) 3789.21,3344.33 3997.87,3344.33 4082.68,3429.13 4113.03,3429.13 U100.60@4148.61,3464.71
  Bottom Layer w5: v1(3523.62,2685.04) 3507.87,2700.79 3507.87,3062.99 v1(3677.17,3232.28)
USER-LED2_CON_6: J501.13 R519.2 | length 111
  Top Layer w6.66: R519.2@3134.84,2325.79 3136.59,2327.53 J501.13@3136.59,2436.05
VDD-3V3: C130.1 C215.1 C216.1 C217.1 C304.1 C400.1 C403.1 C500.1 C503.1 D202.2 FB100.1 FB300.1 FB400.1 FL400.15 FL400.16 J500.1 J501.1 J501.2 P100.1 R308.1 R309.1 R311.1 R314.1 R315.1 R316.2 R317.1 R500.2 R501.2 TP204.1 U202.4 U202.5 U300.9 | length 12785.7
  Top Layer w10: FL400.15@1792.93,817.06 1804.83,817.06 FL400.16@1804.96,816.93 1823.87,816.93 1828.08,812.72 C400.1@1860.55,812.72
  Top Layer w12: v1(1860.24,782.48) 1860.39,782.64 1860.39,812.56 C400.1@1860.55,812.72 1861.4,811.87 1886.95,811.87 v1(1887.8,811.02) ; v1(1973.43,2579.72) 1956.86,2596.29 1956.86,2607.36 R501.2@1948.16,2616.05 1948.16,2617.03 1987.43,2656.3 1996.48,2656.3 2005.25,2665.07 R500.2@2005.25,2666.05 2005.25,2667.03 1977.47,2694.81 1977.47,2700.68 v1(1976.38,2701.77) ; v1(5586.61,5386.81) R309.1@5586.61,5407.48 ; v1(5657.48,5386.81) R308.1@5657.48,5407.48 ; v1(5700.58,5485.03) C304.1@5715.19,5499.64 ; C304.1@5721.46,5505.91 U300.9@5721.46,5569.88 ; v1(5787.8,5386.81) R311.1@5787.8,5407.48 ; v1(5802.17,5476.38) R315.1@5822.8,5476.38 ; R317.1@5907.48,5579.72 R317.1@5907.48,5581.69 ; v1(5907.48,5600.39) R317.1@5907.48,5581.69 ; R316.2@5947.05,5552.95 v1(5947.05,5528.54) ; R316.2@5947.05,5553.15 5946.32,5552.42 5908.21,5552.42 R314.1@5907.48,5551.69 ; v1@5949.8,5528.54 v1(5947.05,5528.54) ; R314.1@5907.48,5551.69 R317.1@5907.48,5581.69 ; R314.1@5907.48,5551.69 5910.34,5548.83 5910.34,5537.07 5917.32,5530.09 v1(5917.32,5528.54) v1(5947.05,5528.54)
  Top Layer w20: v1@1307.09,2343.5 C500.1@1374.02,2343.5 1373.81,2343.71 1373.81,2435.84 J500.1@1373.6,2436.05
  Top Layer w25: FB400.1@1964.57,853.9 1967.52,856.85 v1(1967.52,891.73) v1(1967.52,913.88) ; v1@1967.52,914.86 v1(1967.52,935.04) ; U202.5@2473.16,3687.01 C216.1@2616.14,3687.01 2618.41,3689.27 2671,3689.27 C217.1@2675.2,3693.46 2826.7,3693.46 2839.93,3706.69 D202.2@2988.19,3706.69 ; v1(2506.89,2620.08) C503.1@2586.59,2620.08 J501.2@2586.59,2536.05 2586.59,2486.05 J501.1@2536.59,2436.05 ; TP204.1@2988.19,3795.28 D202.2@2988.19,3706.69 ; FB300.1@5498.65,5916.27 5395.6,5916.27 5298.23,5818.9 5298.23,5406.5 ; v1(5518.7,5377.95) v1(5518.7,5406.5) ; v1(5518.7,5432.09) v1(5518.7,5406.5) ; P100.1@5773.47,4273.78 5773.47,4282.06 5833.18,4341.77 C130.1@5833.18,4344.97 v1(5882.89,4394.69) ; D202.2@2988.19,3706.69 3310.04,3706.69 FB100.1@3456.55,3853.2 3385.83,3923.93 3385.83,4428.15 3703.74,4746.06 4469.49,4746.06 v1(5129.92,5406.5) v1(5150.59,5406.5) v1(5171.26,5406.5) 5298.23,5406.5 ; 5298.23,5406.5 v1(5518.7,5406.5)
  Bottom Layer w20: v1(1307.09,2344.49) 1308.07,2343.5 1355.32,2343.5 1371.06,2327.76 1371.06,2303.15 1397.64,2276.57 2362.2,2276.57
  Bottom Layer w25: v1(1860.24,782.48) 1967.52,889.76 v1(1967.52,891.73) v1(1967.52,913.88) v1(1967.52,935.04) 1967.52,970.47 ; 1967.52,973.43 1967.52,1013.78 2362.2,1408.46 2362.2,2276.57 2362.2,2619.09 ; v1(1973.43,2579.72) 2012.8,2619.09 ; v1(1976.38,2701.77) 1976.38,2655.51 2012.8,2619.09 ; v1(2527.56,2620.08) 2363.19,2620.08 2362.2,2619.09 ; v1(2727.36,3693.9) v1(2750,3693.9) ; v1(2772.64,3693.9) v1(2750,3693.9) ; v1(5129.92,5406.5) v1(5150.59,5406.5) v1(5171.26,5406.5) 5882.89,4694.87 v1(5882.89,4394.69) v1@5866.15,4377.95 ; 2012.8,2619.09 2362.2,2619.09 ; 2362.2,2619.09 2362.2,2708.66 2750,3096.46 v1(2750,3693.9)
  other v1: 1326.77,2344.49 1346.46,2344.49 5866.14,4377.95
VDD-ETH-3V3_4: C300.1 C301.1 C305.1 C306.1 C307.1 C308.1 C309.1 D300.5 FB300.2 R300.2 R301.2 R302.2 R303.2 T300.2 T300.5 U300.1 U300.19 | length 903.5
  Top Layer w10: v1(5574.88,5827.4) C301.1@5574.88,5855.71 v1(5602.28,5855.71) ; v1(5574.88,6004.02) C308.1@5574.88,5975.71 v1(5602.28,5975.71) ; C305.1@5602.36,5723.42 5602.36,5722.44 5612.13,5712.68 5626.89,5712.68 5643.7,5695.87 U300.1@5654.53,5695.87 ; v1(5833.82,5733.27) C306.1@5861.22,5733.27 v1(5861.22,5704.96) ; v1(5833.82,5780.39) C307.1@5861.22,5780.39 v1(5861.22,5808.7) ; v1(5841.85,5860.71) C300.1@5869.25,5860.71 ; v1(5841.85,5970.71) C309.1@5869.25,5970.71 ; v1(5869.25,5832.4) C300.1@5869.25,5860.71 ; v1(5869.25,5889.02) C300.1@5869.25,5860.71 ; v1(5869.25,5942.4) C309.1@5869.25,5970.71 ; v1(5869.25,5999.02) C309.1@5869.25,5970.71
  Top Layer w12: U300.19@5780.51,5723.42 5822.43,5723.42 5832.27,5733.27 v1(5833.82,5733.27)
  Top Layer w20: C301.1@5574.88,5855.71 5571.76,5858.83 5571.76,5913.15 FB300.2@5568.65,5916.27 5571.76,5919.39 5571.76,5972.59 C308.1@5574.88,5975.71 ; v1(5602.36,5695.12) C305.1@5602.36,5723.42 ; v1(5731.3,5839.57) D300.5@5731.3,5875 v1(5731.3,5906.5)
  Bottom Layer w12: v1(5657.48,5818.9) 5732.28,5818.9 v1(5807.09,5818.9)
  Bottom Layer w20: v1(5731.3,5839.57) 5731.3,5819.88 5732.28,5818.9
VDDCR_4: C302.1 C303.1 U300.6 | length 110.6
  Top Layer w12: C303.1@5554.13,5572.83 C302.1@5603.35,5572.83 5619.28,5572.83 5643.89,5597.44 U300.6@5654.53,5597.44
XTAL1_2: C126.1 U100.23 X100.1 | length 225.1
  Top Layer w6: C126.1@3865.68,4219.51 3866.23,4218.96 3881.19,4218.96 X100.1@3899.97,4200.17 ; X100.1@3898.58,4198.78 3898.58,4175.45 3898,4174.87 3898,4167.94 3944.88,4121.06 3962.6,4121.06 4009.42,4074.24 U100.23@4009.42,4072.71
XTAL1_4: C310.1 U300.5 X300.3 | length 219.1
  Top Layer w6: X300.3@5485.93,5607.74 5485.93,5609.7 5498.18,5621.96 5637.3,5621.96 5642.13,5617.13 U300.5@5654.53,5617.13
  Top Layer w8: C310.1@5482.09,5567.83 5482.09,5603.9 X300.3@5485.93,5607.74
XTAL2_2: C125.1 U100.24 X100.3 | length 180.8
  Top Layer w6: C125.1@3857.8,4112.17 3883.17,4137.53 X100.3@3891.62,4137.53 3896.91,4137.53 3929.15,4105.3 3948.99,4105.3 U100.24@3995.5,4058.79
XTAL2_4: C311.1 U300.4 X300.1 | length 263.6
  Top Layer w6: X300.1@5447.54,5657.93 5459.8,5645.68 5459.8,5636.1 5463.31,5632.59 5637.91,5632.59 5642.13,5636.81 U300.4@5654.53,5636.81
  Top Layer w8: C311.1@5412.8,5648.19 5437.8,5648.19 X300.1@5447.54,5657.93
pads on no net: FL400.2 J500.DNC J501.DNC J700.S1 J700.S2 J700.S3 J700.S4 T300.7 T300.MH1 T300.MH2 U100.1 U100.2 U100.3 U100.4 U100.5 U100.8 U100.9 U100.14 U100.15 U100.26 U100.34 U100.37 U100.40 U100.42 U100.46 U100.47 U100.48 U100.49 U100.50 U100.53 U100.54 U100.55 U100.56 U100.57 U100.74 U100.75 U100.76 U100.77 U100.78 U100.79 U100.80 U100.81 U100.82 U100.85 U100.86 U100.87 U100.88 U100.89 U100.90 U100.92 U100.93 U100.100 U100.101 U100.103 U100.104 U100.110 U100.114 U100.115 U100.117 U100.125 U100.127 U100.132 U100.133 U100.134 U100.135 U100.139 U100.140 U100.141 U202.3 U700.10 U701.4

## Polygon pours and split planes (outlines as drawn)
GND on Layer 2 "NONET_L-01_P-001" (solid, pour order 0): 3543.31,5629.92 3031.5,5118.11 1181.1,5118.11 1181.1,0 6181.1,0 6181.1,6023.62 5224.41,6023.62 5224.41,6393.7 3543.31,6393.7
GND on Layer 2 "NONET_L-01_P-001" (solid, pour order 3): 5433.07,6015.75 5433.07,6275.59 5531.5,6374.02 5889.76,6374.02 5984.25,6279.53 5984.25,6015.75
GND on Layer 1 "NONET_L-01_P-001" (solid, pour order 20): 3543.31,5629.92 3031.5,5118.11 1181.1,5118.11 1181.1,0 6141.73,0 6141.73,6023.62 5224.41,6023.62 5224.41,6393.7 3543.31,6393.7
VDD-ETH-3V3_4 on Layer 1 "NONET_L-01_P-001" (solid, pour order 4): 5472.44,6358.27 5472.44,5686.02 5984.25,5686.02 5984.25,6358.27
VDD-3V3 on Layer 1 "NONET_L-01_P-001" (solid, pour order 1): 5974.41,5460.63 5877.95,5364.17 5503.94,5364.17 5503.94,5459.65 5578.53,5534.24 5801.95,5534.24 5881.89,5614.17 5948.43,5614.17 5974.41,5588.19
SHGND on Bottom Layer "NONET_L-01_P-001" (solid, pour order 2): 5314.96,6143.7 6102.36,6143.7 6102.36,6506.3 5314.96,6506.3
AC_PE on Bottom Layer "NONET_L-01_P-001" (solid, pour order 11): 6370.08,0 6370.08,6889.76 6269.36,6889.76 6269.36,0
3V3-LTC on Bottom Layer "NONET_L-01_P-001" (solid, pour order 5): 4254.92,1433.07 4214.57,1392.72 4214.57,1196.22 4259.61,1151.18 4286.02,1151.18 4379.92,1245.08 4519.69,1245.08 4604.33,1160.43 4660.43,1160.43 4680.12,1180.12 4680.12,1218.5 4465.55,1433.07
AC_PE on Bottom Layer "NONET_L-01_P-001" (solid, pour order 12): 6370.08,6889.76 1771.65,6889.76 1771.65,5807.09 1673.23,5708.66 688.98,5708.66 590.55,5807.09 590.55,6889.76 0,6889.76 0,5511.81 1948.82,5511.81 1948.82,6692.91 6370.08,6692.91
AC_PE on Bottom Layer "NONET_L-01_P-001" (solid, pour order 15): 4645.67,6732.28 4645.67,6576.81 4753.98,6468.5 4937.01,6468.5 5039.37,6570.87 5039.37,6732.28
AC_PE on Bottom Layer "NONET_L-01_P-001" (solid, pour order 9): 0,0 0,6889.76 100.72,6889.76 100.72,0
AC_PE on Top Layer "NONET_L-01_P-001" (solid, pour order 8): 6370.08,0 6370.08,6889.76 6269.36,6889.76 6269.36,0
AC_PE on Top Layer "NONET_L-01_P-001" (solid, pour order 13): 4645.67,6732.28 4645.67,6511.81 4700.79,6456.69 4988.19,6456.69 5039.37,6507.87 5039.37,6732.28
GND on Top Layer "NONET_L-01_P-001" (solid, pour order 19): 1975.98,5118.11 ccw(c1975.98,5018.11) 1875.98,5018.11 1875.98,3997.64 ccw(c1975.98,3997.64) 1975.98,3897.64 2760.24,3897.64 ccw(c2760.24,3997.64) 2860.24,3997.64 2860.24,5039.37 ccw(c2781.5,5039.37) 2781.5,5118.11
GND on Top Layer "NONET_L-01_P-001" (solid, pour order 16): 4677.17,6385.83 4842.52,6385.83 4842.52,6291.34 4677.17,6291.34
AC_PE on Top Layer "NONET_L-01_P-001" (solid, pour order 10): 0,0 0,6889.76 100.72,6889.76 100.72,0
GND on Top Layer "NONET_L-01_P-001" (solid, pour order 6): 4049.21,1660.43 3889.76,1500.98 3889.76,1452.76 4060.04,1282.48 4060.04,1125.98 4119.31,1066.72 4131.72,1066.72 4388.78,1323.78 4388.78,1404.53 4132.87,1660.43

## Other copper
Top Layer:
  pour cut-out: 4846.46,6397.64 5027.56,6397.64 5027.56,6039.37 4846.46,6039.37
  pour cut-out: 2526.59,4355.01 2526.59,4333.36 2544.3,4333.36 2544.3,4355.01
  pour cut-out: 2544.3,4402.26 2565.96,4402.26 2565.96,4384.54 2544.3,4384.54
  pour cut-out: 2504.93,4402.26 2504.93,4384.54 2526.59,4384.54 2526.59,4402.26
  region net 3V3-LTC: 4146.65,1434.06 4260.83,1319.88 4280.51,1319.88 4312.99,1352.36 4312.99,1367.13 4203.74,1476.38 4174.21,1476.38 4146.65,1448.82
Layer 2:
  pour cut-out: 4846.46,6397.64 5027.56,6397.64 5027.56,6237.2 4846.46,6237.2

## Silkscreen, mask and mechanical layers (free items; w line width, h text height)
Top Overlay:
  drawing of 27 lines, arcs and shapes, not listed
  text "PE" at 4775.72,6752.09 h157.48
  text "AC N" at 2086.74,6623.38 h157.48
  text "5V" at 4428.34,6110.36 h80 r90
  text "ETHERNET" at 5574.93,6067.06 h80
  text "AC L" at 2088.48,5548.89 h157.48
  text "230VAC → 5VDC" at 2878.08,5528.46 h80
  text "GND" at 4358.39,5307.99 h80
  text "5V" at 4385.03,5122.17 h80 r90
  text "CABLE TIE" at 441.07,4969.24 h80
  text "5V" at 4362.33,4969.3 h80
  text "3.6V" at 2117,4627.62 h80
  text "GND" at 3055.24,4520.59 h80
  text "GND" at 5374.43,4408.16 h80 r45
  text "3.6V" at 3084.98,4294.16 h80 r90
  text "RESET" at 5400.95,4293.26 h80 r45
  text "5VDC → 3.6VDC" at 1837.68,4244.22 h80 r90
  text "SWCLK" at 5470.18,4221.07 h80 r45
  text "3.6V" at 3051.31,4174.13 h80
  text "SWDIO" at 5540.86,4150.32 h80 r45
  text "3.3V" at 5634.9,4102.95 h80 r45
  text "3.6VDC → 3.3VDC" at 2322.96,3831.61 h80
  text "3.3V" at 3052.43,3775.37 h80
  text "3.3V" at 3086.11,3541.07 h80 r90
  text "GND" at 3056.37,3413.16 h80
  text "CABLE TIE" at 441.07,3100.04 h80
  text "3.6V" at 1445.35,2931.59 h80 r90
  text "SPI2 MISO" at 1545.35,2931.59 h80 r90
  text "SPI2 MOSI" at 1645.35,2931.59 h80 r90
  text "SPI2 SCK" at 1745.35,2931.59 h80 r90
  text "SPI2 CS" at 1845.35,2931.59 h80 r90
  text "I2C1 SCL" at 1945.35,2931.59 h80 r90
  text "I2C1 SDA" at 2045.35,2931.59 h80 r90
  text "5V" at 2145.46,2931.59 h80 r90
  text "STM32H563ZI" at 4436.46,2885.88 h80 r45
  text "3.3V" at 2608.34,2746.55 h80 r90
  text "BUTTON1" at 2708.34,2746.55 h80 r90
  text "BUTTON2" at 2808.34,2746.55 h80 r90
  text "BUTTON3" at 2908.34,2746.55 h80 r90
  text "BUTTON4" at 3008.34,2746.55 h80 r90
  text "BUTTON5" at 3108.34,2746.55 h80 r90
  text "BUTTON6" at 3208.34,2746.55 h80 r90
  text "GND" at 3308.34,2746.55 h80 r90
  text "UI CONNECTOR" at 3451.85,2252.09 h80 r90
  text "DISPLAY CONNECTOR" at 1251.07,2173.35 h80 r90
  text "GND" at 1495.35,2146.55 h80 r90
  text "GND" at 1595.35,2146.55 h80 r90
  text "GND" at 1695.35,2146.55 h80 r90
  text "GND" at 1795.35,2146.55 h80 r90
  text "GND" at 1895.35,2146.55 h80 r90
  text "GND" at 1995.35,2146.55 h80 r90
  text "GND" at 2095.35,2146.55 h80 r90
  text "3.3V" at 1395.35,2110.42 h80 r90
  text "GND" at 3258.34,2095.68 h80 r90
  text "LED1" at 3059.12,2064.93 h80 r90
  text "LED2" at 3159.12,2065.1 h80 r90
  text "LED0" at 2958.34,2063.15 h80 r90
  text "3.3V" at 2558.34,2059.55 h80 r90
  text "ENC CH2" at 2758.51,1952.15 h80 r90
  text "ENC CH1" at 2858.51,1951.99 h80 r90
  text "ENC BUTTON" at 2658.34,1838.77 h80 r90
  text "3.6VDC → 3.3VDC" at 4055.17,1827.32 h80 r315
  text "LTC2983" at 3861.66,775.64 h80 r45
  text "CABLE TIE" at 441.07,730.16 h80
  text "microSD" at 1645.8,693.82 h80
  text "Temperature Logger" at 2271.65,271.65 h157.48
  text "Rev. 1.0 | 2026-05-10 / M.Gasiorowski" at 2271.65,70.87 h118.11
  text "Front Panel /  Connector" at 5421.26,15.75 h80 r90
Board Layer Stack Bottom Overlay:
  text "PE" at 4905.39,6752.09 h157.48
  text "AC N" at 2377.83,6623.38 h157.48
  text "AC L" at 2379.57,5548.89 h157.48
  text "GND" at 5457.13,4487.6 h80 r45
  text "RESET" at 5527.84,4416.89 h80 r45
  text "SWCLK" at 5598.55,4346.17 h80 r45
  text "SWDIO" at 5669.26,4275.46 h80 r45
  text "3.3V" at 5739.97,4204.75 h80 r45
  text "SPI2 MISO" at 1545.35,2947.09 h80 r90
  text "SPI2 MOSI" at 1645.35,2943.31 h80 r90
  text "SPI2 SCK" at 1745.35,2909.51 h80 r90
  text "I2C1 SDA" at 2045.35,2908.96 h80 r90
  text "I2C1 SCL" at 1945.35,2904.85 h80 r90
  text "BUTTON4" at 3008.34,2872.28 h80 r90
  text "BUTTON6" at 3208.34,2871.23 h80 r90
  text "SPI2 CS" at 1845.35,2869.77 h80 r90
  text "BUTTON1" at 2708.34,2870.23 h80 r90
  text "BUTTON2" at 2808.34,2870.06 h80 r90
  text "BUTTON3" at 2908.34,2870.17 h80 r90
  text "BUTTON5" at 3108.34,2869.79 h80 r90
  text "3.3V" at 2608.34,2760.78 h80 r90
  text "3.6V" at 1445.35,2759.33 h80 r90
  text "GND" at 3308.34,2724.65 h80 r90
  text "5V" at 2145.46,2683.68 h80 r90
  text "3.3V" at 2558.34,2371.02 h80 r90
  text "ENC BUTTON" at 2658.34,2371.02 h80 r90
  text "ENC CH2" at 2758.51,2371.02 h80 r90
  text "ENC CH1" at 2858.51,2371.02 h80 r90
  text "LED0" at 2958.34,2371.02 h80 r90
  text "LED1" at 3059.12,2371.02 h80 r90
  text "LED2" at 3159.12,2371.02 h80 r90
  text "GND" at 3258.34,2371.02 h80 r90
  text "3.3V" at 1395.35,2366.77 h80 r90
  text "GND" at 1495.35,2366.77 h80 r90
  text "GND" at 1595.35,2366.77 h80 r90
  text "GND" at 1695.35,2366.77 h80 r90
  text "GND" at 1795.35,2366.77 h80 r90
  text "GND" at 1895.35,2366.77 h80 r90
  text "GND" at 1995.35,2366.77 h80 r90
  text "GND" at 2095.35,2366.77 h80 r90
Top Solder:
  region: 6370.08,6889.76 6271.65,6889.76 6271.65,0 6370.08,0
  rectangle: 0,0 98.43,6889.76
Board Layer Stack Bottom Solder:
  rectangle: 0,0 98.43,6889.76
  region: 6370.08,6889.76 6271.65,6889.76 6271.65,0 6370.08,0
Mechanical 1:
  lines w10: 0,0 6370.08,0 6370.08,6889.76 1771.65,6889.76 1771.65,5807.09 1673.23,5708.66 688.98,5708.66 590.55,5807.09 590.55,6889.76 0,6889.76 0,0
  lines w47.24: 2167.32,6122.05 2500,6122.05 2642.23,5979.81 2795.28,5979.81
  lines w59.06: 314.96,682.18 314.96,839.66 ; 314.96,3052.06 314.96,3209.54 ; 314.96,4921.26 314.96,5078.74 ; 870.08,674.3 870.08,831.78 ; 870.08,3044.18 870.08,3201.66 ; 870.08,4913.39 870.08,5070.87